# Altium PCB waku-ctl.PcbDoc (part 2 of 5)
Units mil, origin at the board's own origin, x right, y up, seen from the top; angles counter-clockwise.
Board outline 3530 x 2610 mil, 2 copper layers (Top Layer, Bottom Layer); 84 components, 84 nets, 358 pads, 106 vias.
Unrouted connection lines stored in the file: 42.
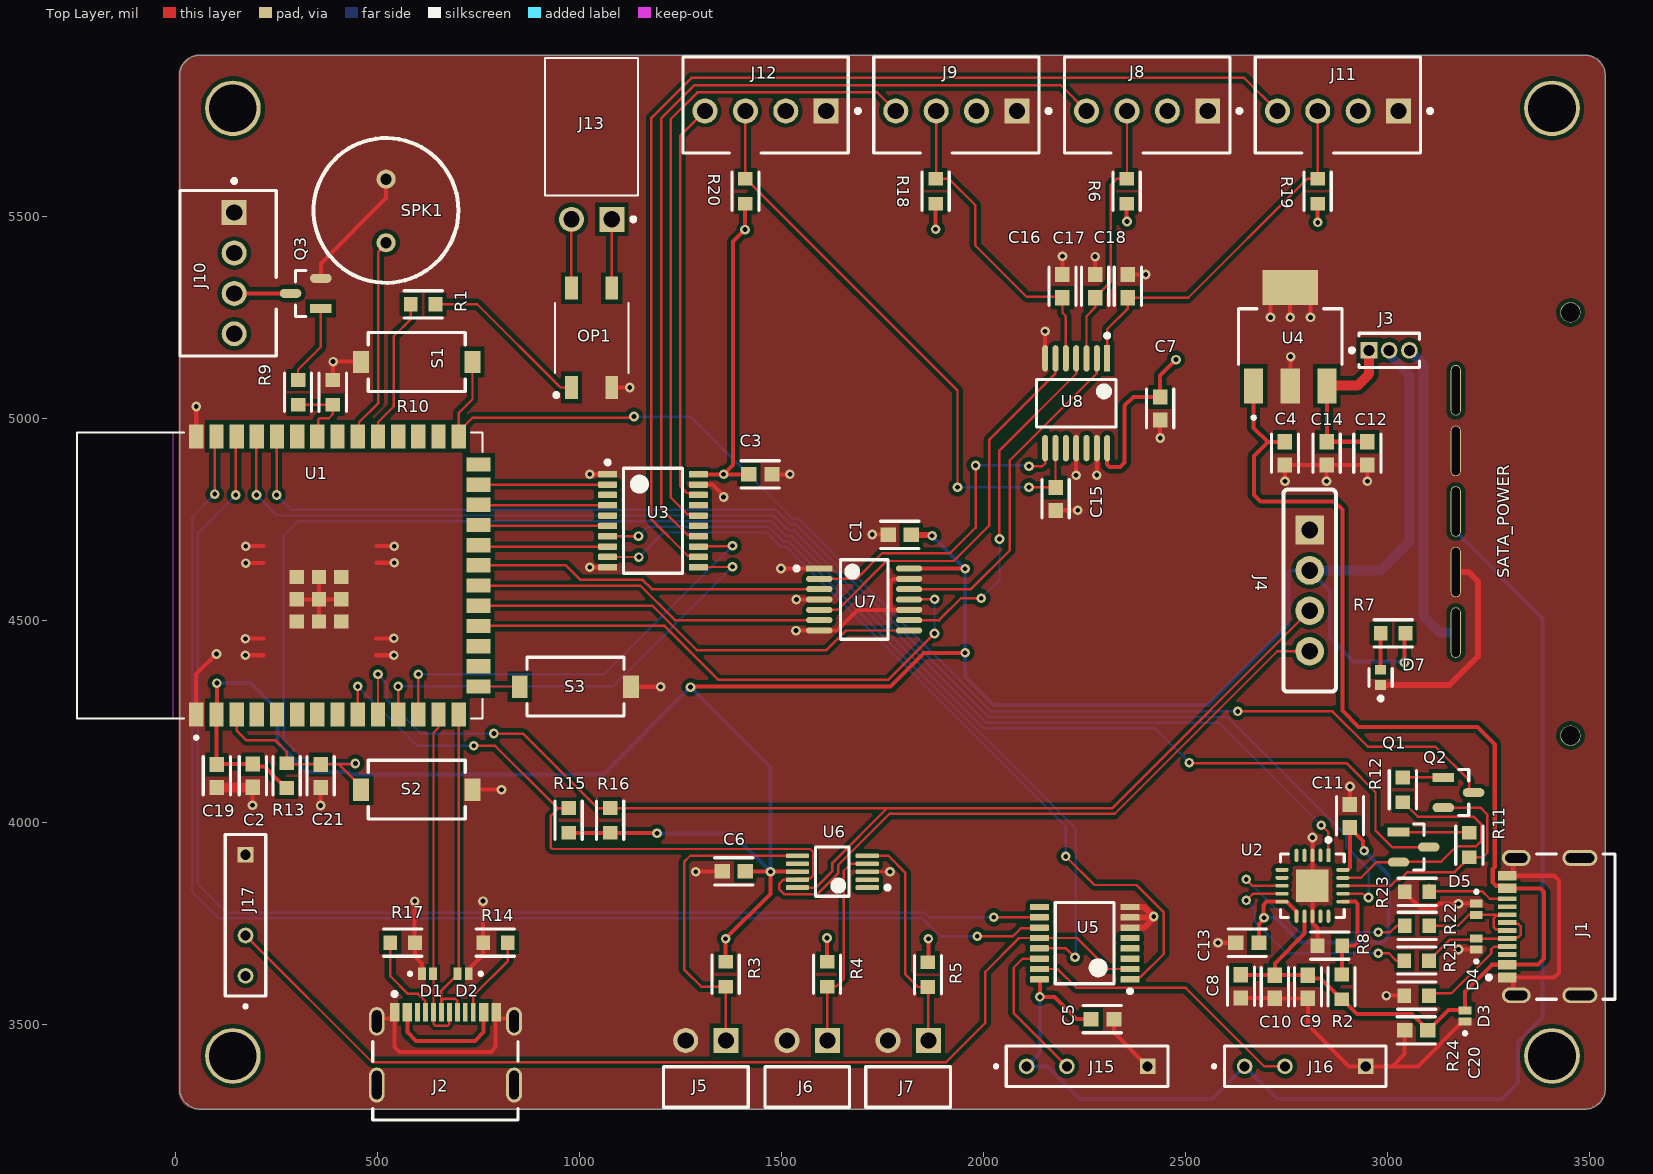
[diagram p0: Top Layer view]

## Part data (continued)
J5 J6 J7: library part 22-28-8020, "CONN HEADER R/A 2POS 2.54MM", Color=Black, Contact Resistance=10mΩ, Current Rating=4A, Flammability Rating="UL94 V-0", Insulation Resistance=1GΩ, LCSC Part Number=C225488, Manufacturer=Molex, Manufacturer Lifecycle Status=ACTIVE, Max Operating Temperature=80°C, Max Voltage Rating (DC)=250.25kV, Min Operating Temperature=-40°C, Operating Force=4.8928N, Supplier Part Number=WM50013-02-ND, Voltage Rating=500V, Voltage Rating (DC)=250V, Category="Headers and Wire Housings", China RoHS=Compliant, ComponentLink1Description=https://datasheet.octopart.com:443/22-28-8020-Molex-datasheet-158885819.pdf?src-supplier=Newark, ComponentLink1URL=https://datasheet.octopart.com:443/22-28-8020-Molex-datasheet-158885819.pdf?src-supplier=Newark, ComponentLink2Description=https://datasheet.octopart.com:443/22-28-8020-Molex-datasheet-16301288.pdf?src-supplier=Molex, ComponentLink2URL=https://datasheet.octopart.com:443/22-28-8020-Molex-datasheet-16301288.pdf?src-supplier=Molex, ComponentLink3Description=https://sigma.octopart.com:443/12577388/technical_drawing/Molex-22-28-8020.pdf?src-supplier=Molex, ComponentLink3URL=https://sigma.octopart.com:443/12577388/technical_drawing/Molex-22-28-8020.pdf?src-supplier=Molex, ComponentLink4Description=https://datasheet.octopart.com:443/022288020-Molex-datasheet-8335722.pdf?src-supplier=Molex, ComponentLink4URL=https://datasheet.octopart.com:443/022288020-Molex-datasheet-8335722.pdf?src-supplier=Molex, ComponentLink5Description=https://datasheet.octopart.com:443/22-28-8020-Molex-datasheet-77519799.pdf?src-supplier=element14+APAC, ComponentLink5URL=https://datasheet.octopart.com:443/22-28-8020-Molex-datasheet-77519799.pdf?src-supplier=element14+APAC, ComponentLink6Description=https://datasheet.octopart.com:443/22-28-8020-Molex-datasheet-21206989.pdf?src-supplier=element14+APAC, ComponentLink6URL=https://datasheet.octopart.com:443/22-28-8020-Molex-datasheet-21206989.pdf?src-supplier=element14+APAC, ComponentLink7Description=https://datasheet.octopart.com:443/22-28-8020-Molex-datasheet-66628180.pdf?src-supplier=element14+APAC, ComponentLink7URL=https://datasheet.octopart.com:443/22-28-8020-Molex-datasheet-66628180.pdf?src-supplier=element14+APAC, ComponentLink8Description=https://datasheet.octopart.com:443/22-28-8020-Molex-datasheet-154747351.pdf?src-supplier=Master+Electronics, ComponentLink8URL=https://datasheet.octopart.com:443/22-28-8020-Molex-datasheet-154747351.pdf?src-supplier=Master+Electronics, ComponentLink9Description=https://datasheet.octopart.com:443/22-28-8020-Molex-datasheet-140181320.pdf?src-supplier=RS+(Formerly+Allied+Electronics), ComponentLink9URL=https://datasheet.octopart.com:443/22-28-8020-Molex-datasheet-140181320.pdf?src-supplier=RS+(Formerly+Allied+Electronics), ComponentLink10Description=https://datasheet.octopart.com:443/22-28-8020-Molex-datasheet-120146384.pdf?src-supplier=RS+(Formerly+Allied+Electronics), ComponentLink10URL=https://datasheet.octopart.com:443/22-28-8020-Molex-datasheet-120146384.pdf?src-supplier=RS+(Formerly+Allied+Electronics), ComponentLink11Description=https://datasheet.octopart.com:443/22-28-8020-Molex-datasheet-62280231.pdf?src-supplier=Electro+Sonic, ComponentLink11URL=https://datasheet.octopart.com:443/22-28-8020-Molex-datasheet-62280231.pdf?src-supplier=Electro+Sonic, ComponentLink12Description=https://datasheet.octopart.com:443/22-28-8020-Molex-datasheet-42201833.pdf?src-supplier=Electro+Sonic, ComponentLink12URL=https://datasheet.octopart.com:443/22-28-8020-Molex-datasheet-42201833.pdf?src-supplier=Electro+Sonic, ComponentLink13Description=https://datasheet.octopart.com:443/22-28-8020-Molex-datasheet-132467.pdf?src-supplier=DigiKey, ComponentLink13URL=https://datasheet.octopart.com:443/22-28-8020-Molex-datasheet-132467.pdf?src-supplier=DigiKey, ComponentLink14Description=http://sigma.octopart.com:80/16301292/rohs_statement/Molex-22-28-8020.pdf?src-supplier=Compliance+Statements, ComponentLink14URL=http://sigma.octopart.com:80/16301292/rohs_statement/Molex-22-28-8020.pdf?src-supplier=Compliance+Statements, ComponentLink15Description=http://sigma.octopart.com:80/conflict_mineral_statement/Molex-company-72.pdf?src-supplier=Compliance+Statements, ComponentLink15URL=http://sigma.octopart.com:80/conflict_mineral_statement/Molex-company-72.pdf?src-supplier=Compliance+Statements, ComponentLink16Description=http://sigma.octopart.com:80/rohs_statement/Molex-company-73.pdf?src-supplier=Compliance+Statements, ComponentLink16URL=http://sigma.octopart.com:80/rohs_statement/Molex-company-73.pdf?src-supplier=Compliance+Statements, ComponentLink17Description=http://sigma.octopart.com:80/reach_statement/Molex-company-74.pdf?src-supplier=Compliance+Statements, ComponentLink17URL=http://sigma.octopart.com:80/reach_statement/Molex-company-74.pdf?src-supplier=Compliance+Statements, Contact Gender=Male, Contact Material="Nickel, Tin", Contact Plating=Tin, Country of Origin=US, Gender=Male, Glow Wire Compliant=Non-compliant, Height=2.74mm, Housing Color=Black, Housing Material=Thermoplastic, Lead Free="Lead Free", Lead Pitch=2.54mm, Lifecycle Status=Production, Manufacturer Part Number=22-28-8020, Mounting Technology="Through Hole", Number of Circuits=2, Number of Contacts=2, Number of Positions=2, Number of Rows=1, Orientation="Right Angle", Packaging=Bulk, Pins=2, Pitch=2.54mm, Plating=Tin, Plating Thickness=2.54µm, Pricing="1=0.38, 10=0.318, 100=0.38, 500=0.24124, 1000=0.22972, 5000=0.20505, 10000=0.19526 (EUR)", Radiation Hardening=No, REACH SVHC=Yes, RoHS=Compliant, Stock=771, Supplier=DigiKey, Terminal Pitch=2.54mm, Termination="Through Hole"
J8 J9 J10 J11 J12: library part 47053-1000, "CONN HEADER VERT 4POS 2.54MM", Ambient Temperature Range High=105°C, Current Rating=500mA, Dielectric Material=Polyamide, Housing Color=Beige, LCSC Part Number=C240840, Manufacturer=Molex, Manufacturer Lifecycle Status=ACTIVE, Max Operating Temperature=75°C, Min Operating Temperature=-40°C, Operating Force=1.946N, Supplier Part Number=WM4330-ND, Voltage Rating=500V, Voltage Rating (DC)=250V, Category="Headers and Wire Housings", China RoHS=Compliant, ComponentLink1Description=https://datasheet.octopart.com:443/47053-1000-Molex-datasheet-154585791.pdf?src-supplier=Sager+Electronics, ComponentLink1URL=https://datasheet.octopart.com:443/47053-1000-Molex-datasheet-154585791.pdf?src-supplier=Sager+Electronics, ComponentLink2Description=https://datasheet.octopart.com:443/47053-1000-Molex-datasheet-13792061.pdf?src-supplier=Sager+Electronics, ComponentLink2URL=https://datasheet.octopart.com:443/47053-1000-Molex-datasheet-13792061.pdf?src-supplier=Sager+Electronics, ComponentLink3Description=https://datasheet.octopart.com:443/0470531000-Molex-datasheet-157440094.pdf?src-supplier=Sager+Electronics, ComponentLink3URL=https://datasheet.octopart.com:443/0470531000-Molex-datasheet-157440094.pdf?src-supplier=Sager+Electronics, ComponentLink4Description=https://sigma.octopart.com:443/154585790/technical_drawing/Molex-47053-1000.pdf?src-supplier=Upverter, ComponentLink4URL=https://sigma.octopart.com:443/154585790/technical_drawing/Molex-47053-1000.pdf?src-supplier=Upverter, ComponentLink5Description=https://datasheet.octopart.com:443/47053-1000-Molex-datasheet-141422371.pdf?src-supplier=Upverter, ComponentLink5URL=https://datasheet.octopart.com:443/47053-1000-Molex-datasheet-141422371.pdf?src-supplier=Upverter, ComponentLink6Description=https://datasheet.octopart.com:443/47053-1000-Molex-datasheet-154585785.pdf?src-supplier=Upverter, ComponentLink6URL=https://datasheet.octopart.com:443/47053-1000-Molex-datasheet-154585785.pdf?src-supplier=Upverter, ComponentLink7Description=https://datasheet.octopart.com:443/47053-1000-Molex-datasheet-16078519.pdf?src-supplier=TME, ComponentLink7URL=https://datasheet.octopart.com:443/47053-1000-Molex-datasheet-16078519.pdf?src-supplier=TME, ComponentLink8Description=https://datasheet.octopart.com:443/470531000-Molex-datasheet-8344792.pdf?src-supplier=Molex, ComponentLink8URL=https://datasheet.octopart.com:443/470531000-Molex-datasheet-8344792.pdf?src-supplier=Molex, ComponentLink9Description=https://datasheet.octopart.com:443/47053-1000-Molex-datasheet-101583033.pdf?src-supplier=element14+APAC, ComponentLink9URL=https://datasheet.octopart.com:443/47053-1000-Molex-datasheet-101583033.pdf?src-supplier=element14+APAC, ComponentLink10Description=https://datasheet.octopart.com:443/47053-1000-Molex-datasheet-154752195.pdf?src-supplier=Master+Electronics, ComponentLink10URL=https://datasheet.octopart.com:443/47053-1000-Molex-datasheet-154752195.pdf?src-supplier=Master+Electronics, ComponentLink11Description=https://datasheet.octopart.com:443/47053-1000-Molex-datasheet-33003494.pdf?src-supplier=Electro+Sonic, ComponentLink11URL=https://datasheet.octopart.com:443/47053-1000-Molex-datasheet-33003494.pdf?src-supplier=Electro+Sonic, ComponentLink12Description=https://datasheet.octopart.com:443/47053-1000-Molex-datasheet-62104864.pdf?src-supplier=Electro+Sonic, ComponentLink12URL=https://datasheet.octopart.com:443/47053-1000-Molex-datasheet-62104864.pdf?src-supplier=Electro+Sonic, ComponentLink13Description=https://datasheet.octopart.com:443/47053-1000-Molex-datasheet-24932734.pdf?src-supplier=Electro+Sonic, ComponentLink13URL=https://datasheet.octopart.com:443/47053-1000-Molex-datasheet-24932734.pdf?src-supplier=Electro+Sonic, ComponentLink14Description=https://datasheet.octopart.com:443/47053-1000-Molex-datasheet-140185186.pdf?src-supplier=RS+(Formerly+Allied+Electronics), ComponentLink14URL=https://datasheet.octopart.com:443/47053-1000-Molex-datasheet-140185186.pdf?src-supplier=RS+(Formerly+Allied+Electronics), ComponentLink15Description=https://datasheet.octopart.com:443/47053-1000-Molex-datasheet-120151286.pdf?src-supplier=RS+(Formerly+Allied+Electronics), ComponentLink15URL=https://datasheet.octopart.com:443/47053-1000-Molex-datasheet-120151286.pdf?src-supplier=RS+(Formerly+Allied+Electronics), ComponentLink16Description=https://datasheet.octopart.com:443/47053-1000-Molex-datasheet-31972472.pdf?src-supplier=RS+(Formerly+Allied+Electronics), ComponentLink16URL=https://datasheet.octopart.com:443/47053-1000-Molex-datasheet-31972472.pdf?src-supplier=RS+(Formerly+Allied+Electronics), ComponentLink17Description=https://datasheet.octopart.com:443/47053-1000-Molex-datasheet-37247467.pdf?src-supplier=RS+(Formerly+Allied+Electronics), ComponentLink17URL=https://datasheet.octopart.com:443/47053-1000-Molex-datasheet-37247467.pdf?src-supplier=RS+(Formerly+Allied+Electronics), ComponentLink18Description=https://datasheet.octopart.com:443/470531000-Molex-datasheet-137316104.pdf?src-supplier=Future+Electronics, ComponentLink18URL=https://datasheet.octopart.com:443/470531000-Molex-datasheet-137316104.pdf?src-supplier=Future+Electronics, ComponentLink19Description=https://datasheet.octopart.com:443/47053-1000-Molex-datasheet-42575110.pdf?src-supplier=Farnell, ComponentLink19URL=https://datasheet.octopart.com:443/47053-1000-Molex-datasheet-42575110.pdf?src-supplier=Farnell, ComponentLink20Description=https://datasheet.octopart.com:443/470531000-Molex-datasheet-151821780.pdf?src-supplier=Toby+Electronics, ComponentLink20URL=https://datasheet.octopart.com:443/470531000-Molex-datasheet-151821780.pdf?src-supplier=Toby+Electronics, ComponentLink21Description=http://sigma.octopart.com:80/16397823/rohs_statement/Molex-47053-1000.pdf?src-supplier=Compliance+Statements, ComponentLink21URL=http://sigma.octopart.com:80/16397823/rohs_statement/Molex-47053-1000.pdf?src-supplier=Compliance+Statements, ComponentLink22Description=http://sigma.octopart.com:80/conflict_mineral_statement/Molex-company-72.pdf?src-supplier=Compliance+Statements, ComponentLink22URL=http://sigma.octopart.com:80/conflict_mineral_statement/Molex-company-72.pdf?src-supplier=Compliance+Statements, ComponentLink23Description=http://sigma.octopart.com:80/rohs_statement/Molex-company-73.pdf?src-supplier=Compliance+Statements, ComponentLink23URL=http://sigma.octopart.com:80/rohs_statement/Molex-company-73.pdf?src-supplier=Compliance+Statements, ComponentLink24Description=http://sigma.octopart.com:80/reach_statement/Molex-company-74.pdf?src-supplier=Compliance+Statements, ComponentLink24URL=http://sigma.octopart.com:80/reach_statement/Molex-company-74.pdf?src-supplier=Compliance+Statements, Contact Gender=Male, Contact Material=Brass, Contact Plating=Tin, Country of Origin=HK, Depth=5.84mm, Gender=Male, Glow Wire Compliant=Non-compliant, Halogen Free="Low Halogen", Height=7.7mm, Housing Material=Nylon, Lead Pitch=2.54mm, Length=10.2mm, Lifecycle Status=Production, Manufacturer Part Number=47053-1000, Mounting Technology="Through Hole", Number of Circuits=2, Number of Contacts=4, Number of Positions=4, Number of Rows=1, Orientation=Vertical, Packaging=Bulk, Pins=4, Pitch=2.54mm, Plating=Copper, Plating Thickness=2.54µm, Pricing="1=0.42, 10=0.354, 100=0.42, 500=0.26844, 1000=0.25562, 5000=0.22817, 10000=0.21729 (EUR)", Radiation Hardening=No, REACH SVHC=Yes, RoHS=Compliant, Schedule B="8536694040, 8536694040|8536694040|8536694040|8536694040|8536694040|8536694040|8536694040|8536694040|8536694040|8536694040|8536694040|8536694040|8536694040|8536694040|8536694040|8536694040|8536694040|8536694040|8536694040|8536694040|8536694040|8536694040|8536694040|85", Stock=47133, Supplier=DigiKey, Terminal Pitch=2.54mm, Termination="Through Hole"
J13: library part SSQ-102-02-T-S-RA, "CONN RCPT 2POS 0.1 TIN PCB R/A", Color=Black, Contact Resistance=10mΩ, Current Rating=6.3A, LCSC Part Number=C6824759, Manufacturer=Samtec, Manufacturer Lifecycle Status=PRODUCTION, Max Current Rating=7.6A, Max Operating Temperature=105°C, Max Voltage Rating (AC)=550V, Min Operating Temperature=-55°C, Supplier Part Number=SAM1195-02-ND, Voltage Rating=655V, Voltage Rating (AC)=465V, Category="Headers and Wire Housings", ComponentLink1Description=https://datasheet.octopart.com:443/SSQ-102-02-T-S-RA-Samtec-datasheet-150873487.pdf?src-supplier=Upverter, ComponentLink1URL=https://datasheet.octopart.com:443/SSQ-102-02-T-S-RA-Samtec-datasheet-150873487.pdf?src-supplier=Upverter, ComponentLink2Description=https://sigma.octopart.com:443/17020302/technical_drawing/Samtec-SSQ-102-02-T-S-RA.pdf?src-supplier=Upverter, ComponentLink2URL=https://sigma.octopart.com:443/17020302/technical_drawing/Samtec-SSQ-102-02-T-S-RA.pdf?src-supplier=Upverter, ComponentLink3Description=https://datasheet.octopart.com:443/SSQ-102-02-T-S-RA-Samtec-datasheet-97291133.pdf?src-supplier=element14+APAC, ComponentLink3URL=https://datasheet.octopart.com:443/SSQ-102-02-T-S-RA-Samtec-datasheet-97291133.pdf?src-supplier=element14+APAC, ComponentLink4Description=https://sigma.octopart.com:443/97291134/technical_drawing/Samtec-SSQ-102-02-T-S-RA.pdf?src-supplier=Samtec, ComponentLink4URL=https://sigma.octopart.com:443/97291134/technical_drawing/Samtec-SSQ-102-02-T-S-RA.pdf?src-supplier=Samtec, ComponentLink5Description=https://datasheet.octopart.com:443/SSQ-102-02-T-S-RA-Samtec-datasheet-118235309.pdf?src-supplier=Electro+Sonic, ComponentLink5URL=https://datasheet.octopart.com:443/SSQ-102-02-T-S-RA-Samtec-datasheet-118235309.pdf?src-supplier=Electro+Sonic, ComponentLink6Description=https://datasheet.octopart.com:443/SSQ-102-02-T-S-RA-Samtec-datasheet-86818373.pdf?src-supplier=Sager+Electronics, ComponentLink6URL=https://datasheet.octopart.com:443/SSQ-102-02-T-S-RA-Samtec-datasheet-86818373.pdf?src-supplier=Sager+Electronics, ComponentLink7Description=https://datasheet.octopart.com:443/SSQ-102-02-T-S-RA-Samtec-datasheet-133811811.pdf?src-supplier=JRH+Electronics, ComponentLink7URL=https://datasheet.octopart.com:443/SSQ-102-02-T-S-RA-Samtec-datasheet-133811811.pdf?src-supplier=JRH+Electronics, Connector Type="Receptacle, Socket", Contact Material="Nickel, Tin", Contact Plating=Tin, Depth=10.03mm, Height=2.54mm, Housing Color=Black, Lead Free="Lead Free", Lead Length=2.54mm, Length=5.59mm, Lifecycle Status=Production, Manufacturer Part Number=SSQ-102-02-T-S-RA, Mounting Technology="Through Hole", Number of Contacts=2, Number of Positions=2, Number of Rows=1, Orientation="Right Angle", Packaging=Bulk, Pitch=2.54mm, Pricing="1=0.46, 10=0.39, 100=0.46, 500=0.29552, 1000=0.28141, 5000=0.25688 (EUR)", Radiation Hardening=No, RoHS=Compliant, Stock=1713, Supplier=DigiKey, Termination=Solder, Voltage Rating (DC)=655V, Width=8.51mm
J15 J16: "NEEDLE CONN HEADER VERT 4POS 2.54MM", LCSC Part Number=C6886151, Manufacturer=Samtec, Manufacturer Lifecycle Status=PRODUCTION, Max Current Rating=1A, Max Operating Temperature=105°C, Min Operating Temperature=-55°C, Supplier Part Number=SAM16040-ND, Category="Headers and Wire Housings", ComponentLink1Description=https://datasheet.octopart.com:443/TS-104-T-AA-Samtec-datasheet-97318998.pdf?src-supplier=Master+Electronics, ComponentLink1URL=https://datasheet.octopart.com:443/TS-104-T-AA-Samtec-datasheet-97318998.pdf?src-supplier=Master+Electronics, ComponentLink2Description=https://datasheet.octopart.com:443/TS-104-T-AA-Samtec-datasheet-150856305.pdf?src-supplier=Electro+Sonic, ComponentLink2URL=https://datasheet.octopart.com:443/TS-104-T-AA-Samtec-datasheet-150856305.pdf?src-supplier=Electro+Sonic, ComponentLink3Description=https://datasheet.octopart.com:443/TS-104-T-AA-Samtec-datasheet-13698575.pdf?src-supplier=Electro+Sonic, ComponentLink3URL=https://datasheet.octopart.com:443/TS-104-T-AA-Samtec-datasheet-13698575.pdf?src-supplier=Electro+Sonic, ComponentLink4Description=https://datasheet.octopart.com:443/TS-104-T-AA-Samtec-datasheet-37173861.pdf?src-supplier=Electro+Sonic, ComponentLink4URL=https://datasheet.octopart.com:443/TS-104-T-AA-Samtec-datasheet-37173861.pdf?src-supplier=Electro+Sonic, ComponentLink5Description=https://datasheet.octopart.com:443/TS-104-T-AA-Samtec-datasheet-41643166.pdf?src-supplier=Farnell, ComponentLink5URL=https://datasheet.octopart.com:443/TS-104-T-AA-Samtec-datasheet-41643166.pdf?src-supplier=Farnell, ComponentLink6Description=https://datasheet.octopart.com:443/TS-104-T-AA-Samtec-datasheet-28904454.pdf?src-supplier=Farnell, ComponentLink6URL=https://datasheet.octopart.com:443/TS-104-T-AA-Samtec-datasheet-28904454.pdf?src-supplier=Farnell, ComponentLink7Description=https://datasheet.octopart.com:443/TS-104-T-AA-Samtec-datasheet-8451641.pdf?src-supplier=Farnell, ComponentLink7URL=https://datasheet.octopart.com:443/TS-104-T-AA-Samtec-datasheet-8451641.pdf?src-supplier=Farnell, ComponentLink8Description=https://datasheet.octopart.com:443/TS-104-T-AA-Samtec-datasheet-179090728.pdf?src-supplier=Sager+Electronics, ComponentLink8URL=https://datasheet.octopart.com:443/TS-104-T-AA-Samtec-datasheet-179090728.pdf?src-supplier=Sager+Electronics, ComponentLink9Description=https://datasheet.octopart.com:443/TS-104-T-AA-Samtec-datasheet-118235246.pdf?src-supplier=Sager+Electronics, ComponentLink9URL=https://datasheet.octopart.com:443/TS-104-T-AA-Samtec-datasheet-118235246.pdf?src-supplier=Sager+Electronics, ComponentLink10Description=https://datasheet.octopart.com:443/TS-104-T-AA-Samtec-datasheet-116533476.pdf?src-supplier=Toby+Electronics, ComponentLink10URL=https://datasheet.octopart.com:443/TS-104-T-AA-Samtec-datasheet-116533476.pdf?src-supplier=Toby+Electronics, ComponentLink11Description=https://datasheet.octopart.com:443/TS-104-T-AA-Samtec-datasheet-116536303.pdf?src-supplier=Toby+Electronics, ComponentLink11URL=https://datasheet.octopart.com:443/TS-104-T-AA-Samtec-datasheet-116536303.pdf?src-supplier=Toby+Electronics, Contact Material=Brass, Contact Plating=Tin, Gender=Male, Lifecycle Status=Production, Manufacturer Part Number=TS-104-T-AA, Mounting Technology="Through Hole", Number of Contacts=4, Number of Rows=1, Orientation=Straight, Pitch=2.54mm, Pricing="1=0.62, 50=0.4858, 100=0.62, 500=0.3324, 1000=0.31706 (EUR)", Radiation Hardening=No, REACH SVHC=No, RoHS=Compliant, Stock=919, Supplier=DigiKey, Termination=Solder
J17: "MACHINE PIN SOCKET 4P 2.54MM PIT", Current Rating=3A, Insulation Resistance=10GΩ, Manufacturer="Adam Tech", Max Operating Temperature=125°C, Min Operating Temperature=-55°C, Supplier Part Number=2057-SMC-1-04-1-GT-ND, Category="Headers and Wire Housings", ComponentLink1Description=https://datasheet.octopart.com:443/SMC-1-04-1-GT-Adam-Tech-datasheet-175106907.pdf?src-supplier=IHS, ComponentLink1URL=https://datasheet.octopart.com:443/SMC-1-04-1-GT-Adam-Tech-datasheet-175106907.pdf?src-supplier=IHS, ComponentLink2Description=https://datasheet.octopart.com:443/SMC-1-04-1-GT-Adam-Tech-datasheet-110600998.pdf?src-supplier=RS+(Formerly+Allied+Electronics), ComponentLink2URL=https://datasheet.octopart.com:443/SMC-1-04-1-GT-Adam-Tech-datasheet-110600998.pdf?src-supplier=RS+(Formerly+Allied+Electronics), ComponentLink3Description=http://sigma.octopart.com:80/rohs_statement/Adam-Tech-company-22.pdf?src-supplier=Compliance+Statements, ComponentLink3URL=http://sigma.octopart.com:80/rohs_statement/Adam-Tech-company-22.pdf?src-supplier=Compliance+Statements, ComponentLink4Description=http://sigma.octopart.com:80/reach_statement/Adam-Tech-company-23.pdf?src-supplier=Compliance+Statements, ComponentLink4URL=http://sigma.octopart.com:80/reach_statement/Adam-Tech-company-23.pdf?src-supplier=Compliance+Statements, Lifecycle Status=Production, Manufacturer Part Number=SMC-1-04-1-GT, Pins=4, Pricing="1=0.22, 10=0.193, 25=0.22, 50=0.1728, 100=0.1644, 250=0.15408, 500=0.14672, 1000=0.13971, 3000=0.12928 (EUR)", REACH SVHC=Yes, RoHS=Compliant, Schedule B="8536694040, 8536694040|8536694040|8536694040|8536694040|8536694040", Supplier=DigiKey, Terminal Pitch=2.54mm
OP1: library part PS2701A-1-F3-A, "OPTOISO 3.75KV 1CH TRANS 4-SOP", Case/Package=SOP, Collector Emitter Breakdown Voltage=70V, Collector Emitter Saturation Voltage=300mV, Current Transfer Ratio=50%, Dark Current=100nA, Forward Current=50mA, Forward Voltage=1.4V, Input Current=5mA, Isolation Voltage=3.75kV, LCSC Part Number=C5334508, Manufacturer=Renesas, Manufacturer Lifecycle Status=ACTIVE, Max Collector Current=30mA, Max Operating Temperature=100°C, Max Power Dissipation=230mW, Min Operating Temperature=-55°C, Output Voltage=40V, Reverse Breakdown Voltage=6V, Supplier Part Number=559-1154-1-ND, Category=Optocouplers, China RoHS=Compliant, Collector Emitter Voltage (VCEO)=70V, ComponentLink1Description=https://datasheet.octopart.com:443/PS2701A-1-F3-A-Renesas-datasheet-157819089.pdf?src-supplier=Newark, ComponentLink1URL=https://datasheet.octopart.com:443/PS2701A-1-F3-A-Renesas-datasheet-157819089.pdf?src-supplier=Newark, ComponentLink2Description=https://datasheet.octopart.com:443/PS2701A-1-F3-A-Renesas-datasheet-179182223.pdf?src-supplier=Integrated+Device+Technology, ComponentLink2URL=https://datasheet.octopart.com:443/PS2701A-1-F3-A-Renesas-datasheet-179182223.pdf?src-supplier=Integrated+Device+Technology, ComponentLink3Description=https://datasheet.octopart.com:443/PS2701A-1-F3-A-Renesas-datasheet-149188193.pdf?src-supplier=Integrated+Device+Technology, ComponentLink3URL=https://datasheet.octopart.com:443/PS2701A-1-F3-A-Renesas-datasheet-149188193.pdf?src-supplier=Integrated+Device+Technology, ComponentLink4Description=https://datasheet.octopart.com:443/PS2701A-1-F3-A-NEC-datasheet-180895236.pdf?src-supplier=IHS, ComponentLink4URL=https://datasheet.octopart.com:443/PS2701A-1-F3-A-NEC-datasheet-180895236.pdf?src-supplier=IHS, ComponentLink5Description=https://datasheet.octopart.com:443/PS2701A-1-F3-A-Renesas-datasheet-141895261.pdf?src-supplier=Renesas, ComponentLink5URL=https://datasheet.octopart.com:443/PS2701A-1-F3-A-Renesas-datasheet-141895261.pdf?src-supplier=Renesas, ComponentLink6Description=https://datasheet.octopart.com:443/PS2701A-1-F3-A-Renesas-datasheet-138175344.pdf?src-supplier=Renesas, ComponentLink6URL=https://datasheet.octopart.com:443/PS2701A-1-F3-A-Renesas-datasheet-138175344.pdf?src-supplier=Renesas, ComponentLink7Description=https://datasheet.octopart.com:443/PS2701A-1-F3-A-Renesas-datasheet-5436770.pdf?src-supplier=element14+APAC, ComponentLink7URL=https://datasheet.octopart.com:443/PS2701A-1-F3-A-Renesas-datasheet-5436770.pdf?src-supplier=element14+APAC, ComponentLink8Description=https://datasheet.octopart.com:443/PS2701A-1-F3-A-Renesas-datasheet-164380605.pdf?src-supplier=SOS+electronic, ComponentLink8URL=https://datasheet.octopart.com:443/PS2701A-1-F3-A-Renesas-datasheet-164380605.pdf?src-supplier=SOS+electronic, ComponentLink9Description=https://datasheet.octopart.com:443/PS2701A-1-F3-A-Renesas-datasheet-134697512.pdf?src-supplier=TME, ComponentLink9URL=https://datasheet.octopart.com:443/PS2701A-1-F3-A-Renesas-datasheet-134697512.pdf?src-supplier=TME, ComponentLink10Description=https://datasheet.octopart.com:443/PS2701A-1-F3-A-Renesas-datasheet-136482170.pdf?src-supplier=Future+Electronics, ComponentLink10URL=https://datasheet.octopart.com:443/PS2701A-1-F3-A-Renesas-datasheet-136482170.pdf?src-supplier=Future+Electronics, ComponentLink11Description=http://sigma.octopart.com:80/conflict_mineral_statement/Renesas-company-44.pdf?src-supplier=Compliance+Statements, ComponentLink11URL=http://sigma.octopart.com:80/conflict_mineral_statement/Renesas-company-44.pdf?src-supplier=Compliance+Statements, ComponentLink12Description=http://sigma.octopart.com:80/reach_statement/Renesas-company-45.pdf?src-supplier=Compliance+Statements, ComponentLink12URL=http://sigma.octopart.com:80/reach_statement/Renesas-company-45.pdf?src-supplier=Compliance+Statements, Contact Plating="Tin Bismuth", Export Control Classification Number (ECCN) Code=EAR99, Fall Time=7µs, Harmonized Tariff Schedule (HTS) Code=8541.49.8000, Height=2.3mm, Lead Free="Lead Free", Lifecycle Status=Production, Manufacturer Part Number=PS2701A-1-F3-A, Max Input Current=30mA, Max Output Voltage=70V, Mounting Technology="Surface Mount", MSL=1, Number of Channels=1, Number of Circuits=1, Number of Elements=1, Part Family=PS2701A-1, Pins=4, Power Dissipation=230mW, Pricing="1=0.84, 10=0.591, 100=0.84, 500=0.36802, 1000=0.34545 (EUR)", Radiation Hardening=No, RAM Size=16kB, REACH SVHC=Yes, Reverse Voltage=6V, Rise Time=5µs, RoHS=Compliant, Stock=13270, Supplier=DigiKey
Q1 Q2 Q3: "TRANS NPN 25V 1.5A SOT-23-3", Case/Package=TO-236-3, Collector Base Voltage (VCBO)=40V, Collector Emitter Breakdown Voltage=25V, Collector Emitter Saturation Voltage=500mV, Emitter Base Voltage (VEBO)=5V, LCSC Part Number=C164886, Manufacturer=Comchip, Max Collector Current=1.5A, Max Junction Temperature (Tj)=150°C, Max Power Dissipation=300mW, Supplier Part Number=641-1790-1-ND, Transition Frequency=100MHz, Category=BJTs, Collector Emitter Voltage (VCEO)=25V, ComponentLink1Description=https://datasheet.octopart.com:443/SS8050-G-Comchip-datasheet-180131983.pdf?src-supplier=IHS, ComponentLink1URL=https://datasheet.octopart.com:443/SS8050-G-Comchip-datasheet-180131983.pdf?src-supplier=IHS, ComponentLink2Description=https://datasheet.octopart.com:443/SS8050-G-Comchip-datasheet-155422643.pdf?src-supplier=Upverter, ComponentLink2URL=https://datasheet.octopart.com:443/SS8050-G-Comchip-datasheet-155422643.pdf?src-supplier=Upverter, ComponentLink3Description=https://datasheet.octopart.com:443/SS8050-G-Comchip-datasheet-189767092.pdf?src-supplier=ODG+(Origin+Data+Global), ComponentLink3URL=https://datasheet.octopart.com:443/SS8050-G-Comchip-datasheet-189767092.pdf?src-supplier=ODG+(Origin+Data+Global), Height=1.15mm, hFE Min=40, Lifecycle Status=Production, Manufacturer Part Number=SS8050-G, Max Breakdown Voltage=25V, Max Operating Temperature=150°C, Mounting Technology="Surface Mount", Number of Elements=1, Number of Terminals=3, Power Dissipation=300mW, Pricing="1=0.2, 10=0.126, 100=0.2, 500=0.05756, 1000=0.05078 (EUR)", REACH SVHC=Yes, RoHS=Compliant, Schedule B=8541100070|8541100070|8541100070|8541100070|8541100070, Stock=59487, Supplier=DigiKey
R1: library part RC0603FR-07330RL, "RES 330 OHM 1% 1/10W 0603", Case Code (Imperial)=2917, Case Code (Metric)=7343, ESR (Equivalent Series Resistance)=800mΩ, LCSC Part Number=C105881, Manufacturer="Yageo Group", Max Operating Temperature=155°C, Max Power Dissipation=100mW, Min Operating Temperature=-55°C, Supplier Part Number=311-330HRCT-ND, Temperature Coefficient=100ppm/°C, Tolerance=1%, Voltage Rating=16V, Voltage Rating (AC)=50V, Working Voltage=75V, Case/Package=2917, Category="Chip SMD Resistors", China RoHS=Non-Compliant, ComponentLink1Description=https://datasheet.octopart.com:443/RC0603FR-07330RL-Yageo-datasheet-175887523.pdf?src-supplier=IHS, ComponentLink1URL=https://datasheet.octopart.com:443/RC0603FR-07330RL-Yageo-datasheet-175887523.pdf?src-supplier=IHS, ComponentLink2Description=https://datasheet.octopart.com:443/RC0603FR-07330RL-Yageo-datasheet-62067350.pdf?src-supplier=Newark, ComponentLink2URL=https://datasheet.octopart.com:443/RC0603FR-07330RL-Yageo-datasheet-62067350.pdf?src-supplier=Newark, ComponentLink3Description=https://datasheet.octopart.com:443/RC0603FR-07330RL-Yageo-datasheet-12596169.pdf?src-supplier=Newark, ComponentLink3URL=https://datasheet.octopart.com:443/RC0603FR-07330RL-Yageo-datasheet-12596169.pdf?src-supplier=Newark, ComponentLink4Description=https://datasheet.octopart.com:443/RC0603FR-07330RL-Yageo-datasheet-503470.pdf?src-supplier=Newark, ComponentLink4URL=https://datasheet.octopart.com:443/RC0603FR-07330RL-Yageo-datasheet-503470.pdf?src-supplier=Newark, ComponentLink5Description=https://datasheet.octopart.com:443/RC0603FR-07330RL-Yageo-datasheet-34211833.pdf?src-supplier=Newark, ComponentLink5URL=https://datasheet.octopart.com:443/RC0603FR-07330RL-Yageo-datasheet-34211833.pdf?src-supplier=Newark, ComponentLink6Description=https://datasheet.octopart.com:443/RC0603FR-07330RL-Yageo-datasheet-103092701.pdf?src-supplier=Upverter, ComponentLink6URL=https://datasheet.octopart.com:443/RC0603FR-07330RL-Yageo-datasheet-103092701.pdf?src-supplier=Upverter, ComponentLink7Description=https://datasheet.octopart.com:443/RC0603FR-07330RL-Yageo-datasheet-98239111.pdf?src-supplier=Upverter, ComponentLink7URL=https://datasheet.octopart.com:443/RC0603FR-07330RL-Yageo-datasheet-98239111.pdf?src-supplier=Upverter, ComponentLink8Description=https://datasheet.octopart.com:443/RC0603FR-07330RL-Yageo-datasheet-8328172.pdf?src-supplier=element14+APAC, ComponentLink8URL=https://datasheet.octopart.com:443/RC0603FR-07330RL-Yageo-datasheet-8328172.pdf?src-supplier=element14+APAC, ComponentLink9Description=https://datasheet.octopart.com:443/RC0603FR-07330RL-Yageo-datasheet-15599030.pdf?src-supplier=Future+Electronics, ComponentLink9URL=https://datasheet.octopart.com:443/RC0603FR-07330RL-Yageo-datasheet-15599030.pdf?src-supplier=Future+Electronics, ComponentLink10Description=https://datasheet.octopart.com:443/RC0603FR-07330RL-Yageo-datasheet-164759695.pdf?src-supplier=Future+Electronics, ComponentLink10URL=https://datasheet.octopart.com:443/RC0603FR-07330RL-Yageo-datasheet-164759695.pdf?src-supplier=Future+Electronics, ComponentLink11Description=https://datasheet.octopart.com:443/RC0603FR-07330RL-Yageo-datasheet-137700087.pdf?src-supplier=Future+Electronics, ComponentLink11URL=https://datasheet.octopart.com:443/RC0603FR-07330RL-Yageo-datasheet-137700087.pdf?src-supplier=Future+Electronics, ComponentLink12Description=https://datasheet.octopart.com:443/RC0603FR-07330RL-Yageo-datasheet-27584510.pdf?src-supplier=Future+Electronics, ComponentLink12URL=https://datasheet.octopart.com:443/RC0603FR-07330RL-Yageo-datasheet-27584510.pdf?src-supplier=Future+Electronics, ComponentLink13Description=https://datasheet.octopart.com:443/RC0603FR-07330RL-Yageo-datasheet-8324193.pdf?src-supplier=Future+Electronics, ComponentLink13URL=https://datasheet.octopart.com:443/RC0603FR-07330RL-Yageo-datasheet-8324193.pdf?src-supplier=Future+Electronics, ComponentLink14Description=https://datasheet.octopart.com:443/RC0603FR-07330RL-Yageo-datasheet-79472498.pdf?src-supplier=Megastar, ComponentLink14URL=https://datasheet.octopart.com:443/RC0603FR-07330RL-Yageo-datasheet-79472498.pdf?src-supplier=Megastar, ComponentLink15Description=https://datasheet.octopart.com/RC0603FR-07330RL-Yageo-datasheet-73766026.pdf, ComponentLink15URL=https://datasheet.octopart.com/RC0603FR-07330RL-Yageo-datasheet-73766026.pdf, ComponentLink16Description=https://datasheet.octopart.com:443/RC0603FR-07330RL-Yageo-datasheet-13691069.pdf?src-supplier=Farnell, ComponentLink16URL=https://datasheet.octopart.com:443/RC0603FR-07330RL-Yageo-datasheet-13691069.pdf?src-supplier=Farnell, ComponentLink17Description=https://datasheet.octopart.com:443/RC0603FR-07330RL-Yageo-datasheet-118562.pdf?src-supplier=DigiKey, ComponentLink17URL=https://datasheet.octopart.com:443/RC0603FR-07330RL-Yageo-datasheet-118562.pdf?src-supplier=DigiKey, ComponentLink18Description=http://sigma.octopart.com:80/rohs_statement/Yageo-company-2.pdf?src-supplier=Compliance+Statements, ComponentLink18URL=http://sigma.octopart.com:80/rohs_statement/Yageo-company-2.pdf?src-supplier=Compliance+Statements, ComponentLink19Description=http://sigma.octopart.com:80/conflict_mineral_statement/Yageo-company-3.pdf?src-supplier=Compliance+Statements, ComponentLink19URL=http://sigma.octopart.com:80/conflict_mineral_statement/Yageo-company-3.pdf?src-supplier=Compliance+Statements, Composition="Thick Film", Depth=800µm, Features="Moisture Resistant", Height=450µm, Lead Free="Lead Free", Length=7.3mm, Lifecycle Status=Production, Manufacturer Part Number=RC0603FR-07330RL, Mounting Technology="Surface Mount", Number of Terminals=2, Number of Terminations=2, Packaging="Tape and Reel", Pins=2, Power Dissipation=100mW, Power Rating=100mW, Pricing="1=0.1, 10=0.022, 25=0.0164, 50=0.013, 100=0.0106, 250=0.00812, 500=0.00676, 1000=0.00569 (USD)", Radiation Hardening=No, REACH SVHC=Yes, RoHS=Compliant, Schedule B="8533210045, 8533210045|8533210045, 8533210045|8533210045|8533210045, 8533210045|8533210045|8533210045|8533210045", Stock=52985, Supplier=DigiKey, Termination=SMD/SMT, Voltage Rating (DC)=16V, Width=800µm
R2: library part RC0603FR-074K7L, "RES 4.7K OHM 1% 1/10W 0603", Case Code (Imperial)=0603, LCSC Part Number=C99782, Manufacturer="Yageo Group", Max Operating Temperature=155°C, Min Operating Temperature=-55°C, Power Dissipation=100mW, Supplier Part Number=311-4.70KHRDKR-ND, Temperature Coefficient=100ppm/°C, Tolerance=1%, Voltage Rating=75V, Voltage Rating (DC)=50V, Case/Package=0603, Category="Chip SMD Resistors", China RoHS=Non-Compliant, ComponentLink1Description=https://datasheet.octopart.com:443/RC0603FR-074K7L-Yageo-datasheet-175887523.pdf?src-supplier=IHS, ComponentLink1URL=https://datasheet.octopart.com:443/RC0603FR-074K7L-Yageo-datasheet-175887523.pdf?src-supplier=IHS, ComponentLink2Description=https://datasheet.octopart.com:443/RC0603FR-074K7L-Yageo-datasheet-103092701.pdf?src-supplier=Upverter, ComponentLink2URL=https://datasheet.octopart.com:443/RC0603FR-074K7L-Yageo-datasheet-103092701.pdf?src-supplier=Upverter, ComponentLink3Description=https://datasheet.octopart.com:443/RC0603FR-074K7L-Yageo-datasheet-8328172.pdf?src-supplier=Farnell, ComponentLink3URL=https://datasheet.octopart.com:443/RC0603FR-074K7L-Yageo-datasheet-8328172.pdf?src-supplier=Farnell, ComponentLink4Description=https://datasheet.octopart.com:443/RC0603FR-074K7L-Yageo-datasheet-13691069.pdf?src-supplier=Farnell, ComponentLink4URL=https://datasheet.octopart.com:443/RC0603FR-074K7L-Yageo-datasheet-13691069.pdf?src-supplier=Farnell, ComponentLink5Description=https://datasheet.octopart.com:443/RC0603FR-074K7L-Yageo-datasheet-175423674.pdf?src-supplier=Newark, ComponentLink5URL=https://datasheet.octopart.com:443/RC0603FR-074K7L-Yageo-datasheet-175423674.pdf?src-supplier=Newark, ComponentLink6Description=https://datasheet.octopart.com:443/RC0603FR-074K7L-Yageo-datasheet-12596169.pdf?src-supplier=Newark, ComponentLink6URL=https://datasheet.octopart.com:443/RC0603FR-074K7L-Yageo-datasheet-12596169.pdf?src-supplier=Newark, ComponentLink7Description=https://datasheet.octopart.com:443/RC0603FR-074K7L-Yageo-datasheet-503470.pdf?src-supplier=Newark, ComponentLink7URL=https://datasheet.octopart.com:443/RC0603FR-074K7L-Yageo-datasheet-503470.pdf?src-supplier=Newark, ComponentLink8Description=https://datasheet.octopart.com:443/RC0603FR-074K7L-Yageo-datasheet-34211833.pdf?src-supplier=element14+APAC, ComponentLink8URL=https://datasheet.octopart.com:443/RC0603FR-074K7L-Yageo-datasheet-34211833.pdf?src-supplier=element14+APAC, ComponentLink9Description=https://datasheet.octopart.com:443/RC0603FR-074K7L-Yageo-datasheet-62067350.pdf?src-supplier=element14+APAC, ComponentLink9URL=https://datasheet.octopart.com:443/RC0603FR-074K7L-Yageo-datasheet-62067350.pdf?src-supplier=element14+APAC, ComponentLink10Description=https://datasheet.octopart.com:443/RC0603FR-074K7L-Yageo-datasheet-17842380.pdf?src-supplier=element14+APAC, ComponentLink10URL=https://datasheet.octopart.com:443/RC0603FR-074K7L-Yageo-datasheet-17842380.pdf?src-supplier=element14+APAC, ComponentLink11Description=https://datasheet.octopart.com:443/RC0603FR-074K7L-Yageo-datasheet-164759695.pdf?src-supplier=Future+Electronics, ComponentLink11URL=https://datasheet.octopart.com:443/RC0603FR-074K7L-Yageo-datasheet-164759695.pdf?src-supplier=Future+Electronics, ComponentLink12Description=https://datasheet.octopart.com:443/RC0603FR-074K7L-Yageo-datasheet-137700087.pdf?src-supplier=Future+Electronics, ComponentLink12URL=https://datasheet.octopart.com:443/RC0603FR-074K7L-Yageo-datasheet-137700087.pdf?src-supplier=Future+Electronics, ComponentLink13Description=https://datasheet.octopart.com:443/RC0603FR074K7L-Yageo-datasheet-27584510.pdf?src-supplier=Future+Electronics, ComponentLink13URL=https://datasheet.octopart.com:443/RC0603FR074K7L-Yageo-datasheet-27584510.pdf?src-supplier=Future+Electronics, ComponentLink14Description=https://datasheet.octopart.com:443/RC0603FR-074K7L-Yageo-datasheet-15599030.pdf?src-supplier=Future+Electronics, ComponentLink14URL=https://datasheet.octopart.com:443/RC0603FR-074K7L-Yageo-datasheet-15599030.pdf?src-supplier=Future+Electronics, ComponentLink15Description=https://datasheet.octopart.com:443/RC0603FR-074K7L-Yageo-datasheet-79472498.pdf?src-supplier=Megastar, ComponentLink15URL=https://datasheet.octopart.com:443/RC0603FR-074K7L-Yageo-datasheet-79472498.pdf?src-supplier=Megastar, ComponentLink16Description=https://datasheet.octopart.com/RC0603FR-074K7L-Yageo-datasheet-73766026.pdf, ComponentLink16URL=https://datasheet.octopart.com/RC0603FR-074K7L-Yageo-datasheet-73766026.pdf, ComponentLink17Description=https://datasheet.octopart.com:443/RC0603FR-074K7L-Yageo-datasheet-118562.pdf?src-supplier=DigiKey, ComponentLink17URL=https://datasheet.octopart.com:443/RC0603FR-074K7L-Yageo-datasheet-118562.pdf?src-supplier=DigiKey, ComponentLink18Description=http://sigma.octopart.com:80/rohs_statement/Yageo-company-2.pdf?src-supplier=Compliance+Statements, ComponentLink18URL=http://sigma.octopart.com:80/rohs_statement/Yageo-company-2.pdf?src-supplier=Compliance+Statements, ComponentLink19Description=http://sigma.octopart.com:80/conflict_mineral_statement/Yageo-company-3.pdf?src-supplier=Compliance+Statements, ComponentLink19URL=http://sigma.octopart.com:80/conflict_mineral_statement/Yageo-company-3.pdf?src-supplier=Compliance+Statements, Composition="Thick Film", Depth=800µm, Height=450µm, Lead Free="Lead Free", Lead Pitch=300µm, Length=1.6mm, Lifecycle Status=Production, Manufacturer Part Number=RC0603FR-074K7L, Military Standard=Not, Mounting Technology="Surface Mount", Number of Terminals=2, Packaging="Tape & Reel", Pins=2, Power Rating=100mW, Pricing="1=0.1, 10=0.009, 25=0.0088, 50=0.0052 (USD)", REACH SVHC=Yes, RoHS=Compliant, Schedule B="8533210045, 8533210045|8533210045|8533210045|8533210045|8533210045|8533210045|8533210045|8533210045|8533210045|8533210045|8533210045|8533210045|8533210045|8533210045|8533210045|8533210045|8533210045|8533210045|8533210045|8533210045|8533210045|8533210045|8533210045|85", Stock=232694, Supplier=DigiKey, Termination=SMD/SMT, Width=800µm, Working Voltage=75V
R3 R4 R5 R6 R8 R10 R11 R12 R13 R15 R16 R18 R19 R20: library part RC0603FR-0710KL, "RES 10K OHM 1% 1/10W 0603", Case Code (Imperial)=0603, LCSC Part Number=C98220, Manufacturer="Yageo Group", Max Operating Temperature=155°C, Min Operating Temperature=-55°C, Power Dissipation=100mW, Supplier Part Number=311-10.0KHRCT-ND, Temperature Coefficient=100ppm/°C, Tolerance=1%, Voltage Rating=75V, Voltage Rating (DC)=50V, Case Code (Metric)=0603, Case/Package=0603, Category="Chip SMD Resistors", China RoHS=Non-Compliant, ComponentLink1Description=https://datasheet.octopart.com:443/RC0603FR-0710KL-Yageo-datasheet-175887523.pdf?src-supplier=IHS, ComponentLink1URL=https://datasheet.octopart.com:443/RC0603FR-0710KL-Yageo-datasheet-175887523.pdf?src-supplier=IHS, ComponentLink2Description=https://datasheet.octopart.com:443/RC0603FR-0710KL-Yageo-datasheet-103092701.pdf?src-supplier=Upverter, ComponentLink2URL=https://datasheet.octopart.com:443/RC0603FR-0710KL-Yageo-datasheet-103092701.pdf?src-supplier=Upverter, ComponentLink3Description=https://datasheet.octopart.com:443/RC0603FR-0710KL-Yageo-datasheet-98239111.pdf?src-supplier=Upverter, ComponentLink3URL=https://datasheet.octopart.com:443/RC0603FR-0710KL-Yageo-datasheet-98239111.pdf?src-supplier=Upverter, ComponentLink4Description=https://datasheet.octopart.com:443/RC0603FR-0710KL-Yageo-datasheet-141265859.pdf?src-supplier=Upverter, ComponentLink4URL=https://datasheet.octopart.com:443/RC0603FR-0710KL-Yageo-datasheet-141265859.pdf?src-supplier=Upverter, ComponentLink5Description=https://sigma.octopart.com:443/138820526/technical_drawing/Yageo-RC0603FR-0710KL.pdf?src-supplier=Upverter, ComponentLink5URL=https://sigma.octopart.com:443/138820526/technical_drawing/Yageo-RC0603FR-0710KL.pdf?src-supplier=Upverter, ComponentLink6Description=https://datasheet.octopart.com:443/RC0603FR-0710KL-Yageo-datasheet-8328172.pdf?src-supplier=Farnell, ComponentLink6URL=https://datasheet.octopart.com:443/RC0603FR-0710KL-Yageo-datasheet-8328172.pdf?src-supplier=Farnell, ComponentLink7Description=https://datasheet.octopart.com:443/RC0603FR-0710KL-Yageo-datasheet-13691069.pdf?src-supplier=Farnell, ComponentLink7URL=https://datasheet.octopart.com:443/RC0603FR-0710KL-Yageo-datasheet-13691069.pdf?src-supplier=Farnell, ComponentLink8Description=https://datasheet.octopart.com:443/RC0603FR-0710KL-Yageo-datasheet-62067350.pdf?src-supplier=element14+APAC, ComponentLink8URL=https://datasheet.octopart.com:443/RC0603FR-0710KL-Yageo-datasheet-62067350.pdf?src-supplier=element14+APAC, ComponentLink9Description=https://datasheet.octopart.com:443/RC0603FR-0710KL-Yageo-datasheet-17842380.pdf?src-supplier=element14+APAC, ComponentLink9URL=https://datasheet.octopart.com:443/RC0603FR-0710KL-Yageo-datasheet-17842380.pdf?src-supplier=element14+APAC, ComponentLink10Description=https://datasheet.octopart.com:443/RC0603FR-0710KL-Yageo-datasheet-15599030.pdf?src-supplier=Future+Electronics, ComponentLink10URL=https://datasheet.octopart.com:443/RC0603FR-0710KL-Yageo-datasheet-15599030.pdf?src-supplier=Future+Electronics, ComponentLink11Description=https://datasheet.octopart.com:443/RC0603FR-0710KL-Yageo-datasheet-164759695.pdf?src-supplier=Future+Electronics, ComponentLink11URL=https://datasheet.octopart.com:443/RC0603FR-0710KL-Yageo-datasheet-164759695.pdf?src-supplier=Future+Electronics, ComponentLink12Description=https://datasheet.octopart.com:443/RC0603FR-0710KL-Yageo-datasheet-127823281.pdf?src-supplier=Future+Electronics, ComponentLink12URL=https://datasheet.octopart.com:443/RC0603FR-0710KL-Yageo-datasheet-127823281.pdf?src-supplier=Future+Electronics, ComponentLink13Description=https://datasheet.octopart.com:443/RC0603FR-0710KL-Yageo-datasheet-137700087.pdf?src-supplier=Future+Electronics, ComponentLink13URL=https://datasheet.octopart.com:443/RC0603FR-0710KL-Yageo-datasheet-137700087.pdf?src-supplier=Future+Electronics, ComponentLink14Description=https://datasheet.octopart.com:443/RC0603FR-0710KL-Yageo-datasheet-27584510.pdf?src-supplier=Future+Electronics, ComponentLink14URL=https://datasheet.octopart.com:443/RC0603FR-0710KL-Yageo-datasheet-27584510.pdf?src-supplier=Future+Electronics, ComponentLink15Description=https://datasheet.octopart.com:443/RC0603FR-0710KL-Yageo-datasheet-8324193.pdf?src-supplier=Future+Electronics, ComponentLink15URL=https://datasheet.octopart.com:443/RC0603FR-0710KL-Yageo-datasheet-8324193.pdf?src-supplier=Future+Electronics, ComponentLink16Description=https://datasheet.octopart.com:443/RC0603FR-0710KL-Yageo-datasheet-12596169.pdf?src-supplier=Newark, ComponentLink16URL=https://datasheet.octopart.com:443/RC0603FR-0710KL-Yageo-datasheet-12596169.pdf?src-supplier=Newark, ComponentLink17Description=https://datasheet.octopart.com:443/RC0603FR-0710KL-Yageo-datasheet-503470.pdf?src-supplier=Newark, ComponentLink17URL=https://datasheet.octopart.com:443/RC0603FR-0710KL-Yageo-datasheet-503470.pdf?src-supplier=Newark, ComponentLink18Description=https://datasheet.octopart.com:443/RC0603FR-0710KL-Yageo-datasheet-34211833.pdf?src-supplier=Newark, ComponentLink18URL=https://datasheet.octopart.com:443/RC0603FR-0710KL-Yageo-datasheet-34211833.pdf?src-supplier=Newark, ComponentLink19Description=https://datasheet.octopart.com:443/RC0603FR-0710KL-Yageo-datasheet-79472498.pdf?src-supplier=Megastar, ComponentLink19URL=https://datasheet.octopart.com:443/RC0603FR-0710KL-Yageo-datasheet-79472498.pdf?src-supplier=Megastar, ComponentLink20Description=https://datasheet.octopart.com/RC0603FR-0710KL-Yageo-datasheet-73766026.pdf, ComponentLink20URL=https://datasheet.octopart.com/RC0603FR-0710KL-Yageo-datasheet-73766026.pdf, ComponentLink21Description=https://datasheet.octopart.com:443/RC0603FR-0710KL-Yageo-datasheet-118562.pdf?src-supplier=DigiKey, ComponentLink21URL=https://datasheet.octopart.com:443/RC0603FR-0710KL-Yageo-datasheet-118562.pdf?src-supplier=DigiKey, ComponentLink22Description=http://sigma.octopart.com:80/conflict_mineral_statement/Yageo-company-3.pdf?src-supplier=Compliance+Statements, ComponentLink22URL=http://sigma.octopart.com:80/conflict_mineral_statement/Yageo-company-3.pdf?src-supplier=Compliance+Statements, ComponentLink23Description=http://sigma.octopart.com:80/rohs_statement/Yageo-company-2.pdf?src-supplier=Compliance+Statements, ComponentLink23URL=http://sigma.octopart.com:80/rohs_statement/Yageo-company-2.pdf?src-supplier=Compliance+Statements, Composition="Thick Film", Depth=800µm, Height=450µm, Lead Free="Lead Free", Lead Pitch=300µm, Length=1.6mm, Lifecycle Status=Production, Manufacturer Part Number=RC0603FR-0710KL, Military Standard=Not, Mounting Technology="Surface Mount", Number of Terminals=2, Packaging="Tape & Reel", Pins=2, Power Rating=100mW, Pricing="1=0.1, 10=0.006, 25=0.0052 (USD)", REACH SVHC=Yes, RoHS=Compliant, Schedule B="8533210045, 8533210045|8533210045|8533210045|8533210045|8533210045|8533210045|8533210045|8533210045|8533210045|8533210045|8533210045|8533210045|8533210045|8533210045|8533210045|8533210045|8533210045|8533210045|8533210045|8533210045|8533210045|8533210045|8533210045|85", Stock=14146615, Supplier=DigiKey, Termination=SMD/SMT, Weight=2.012816mg, Width=800µm, Working Voltage=75V